# Altium PCB Battery_Converter.PcbDoc (part 2 of 2)
Units mm, origin at the board's own origin, x right, y up, seen from the top; angles counter-clockwise.
Board outline 240.65 x 121.03 mm, 2 copper layers (Power Layer, Signal Layer), stack 0.532 mm thick; 177 components, 92 nets, 492 pads, 9 vias.
Unrouted connection lines stored in the file: 129.
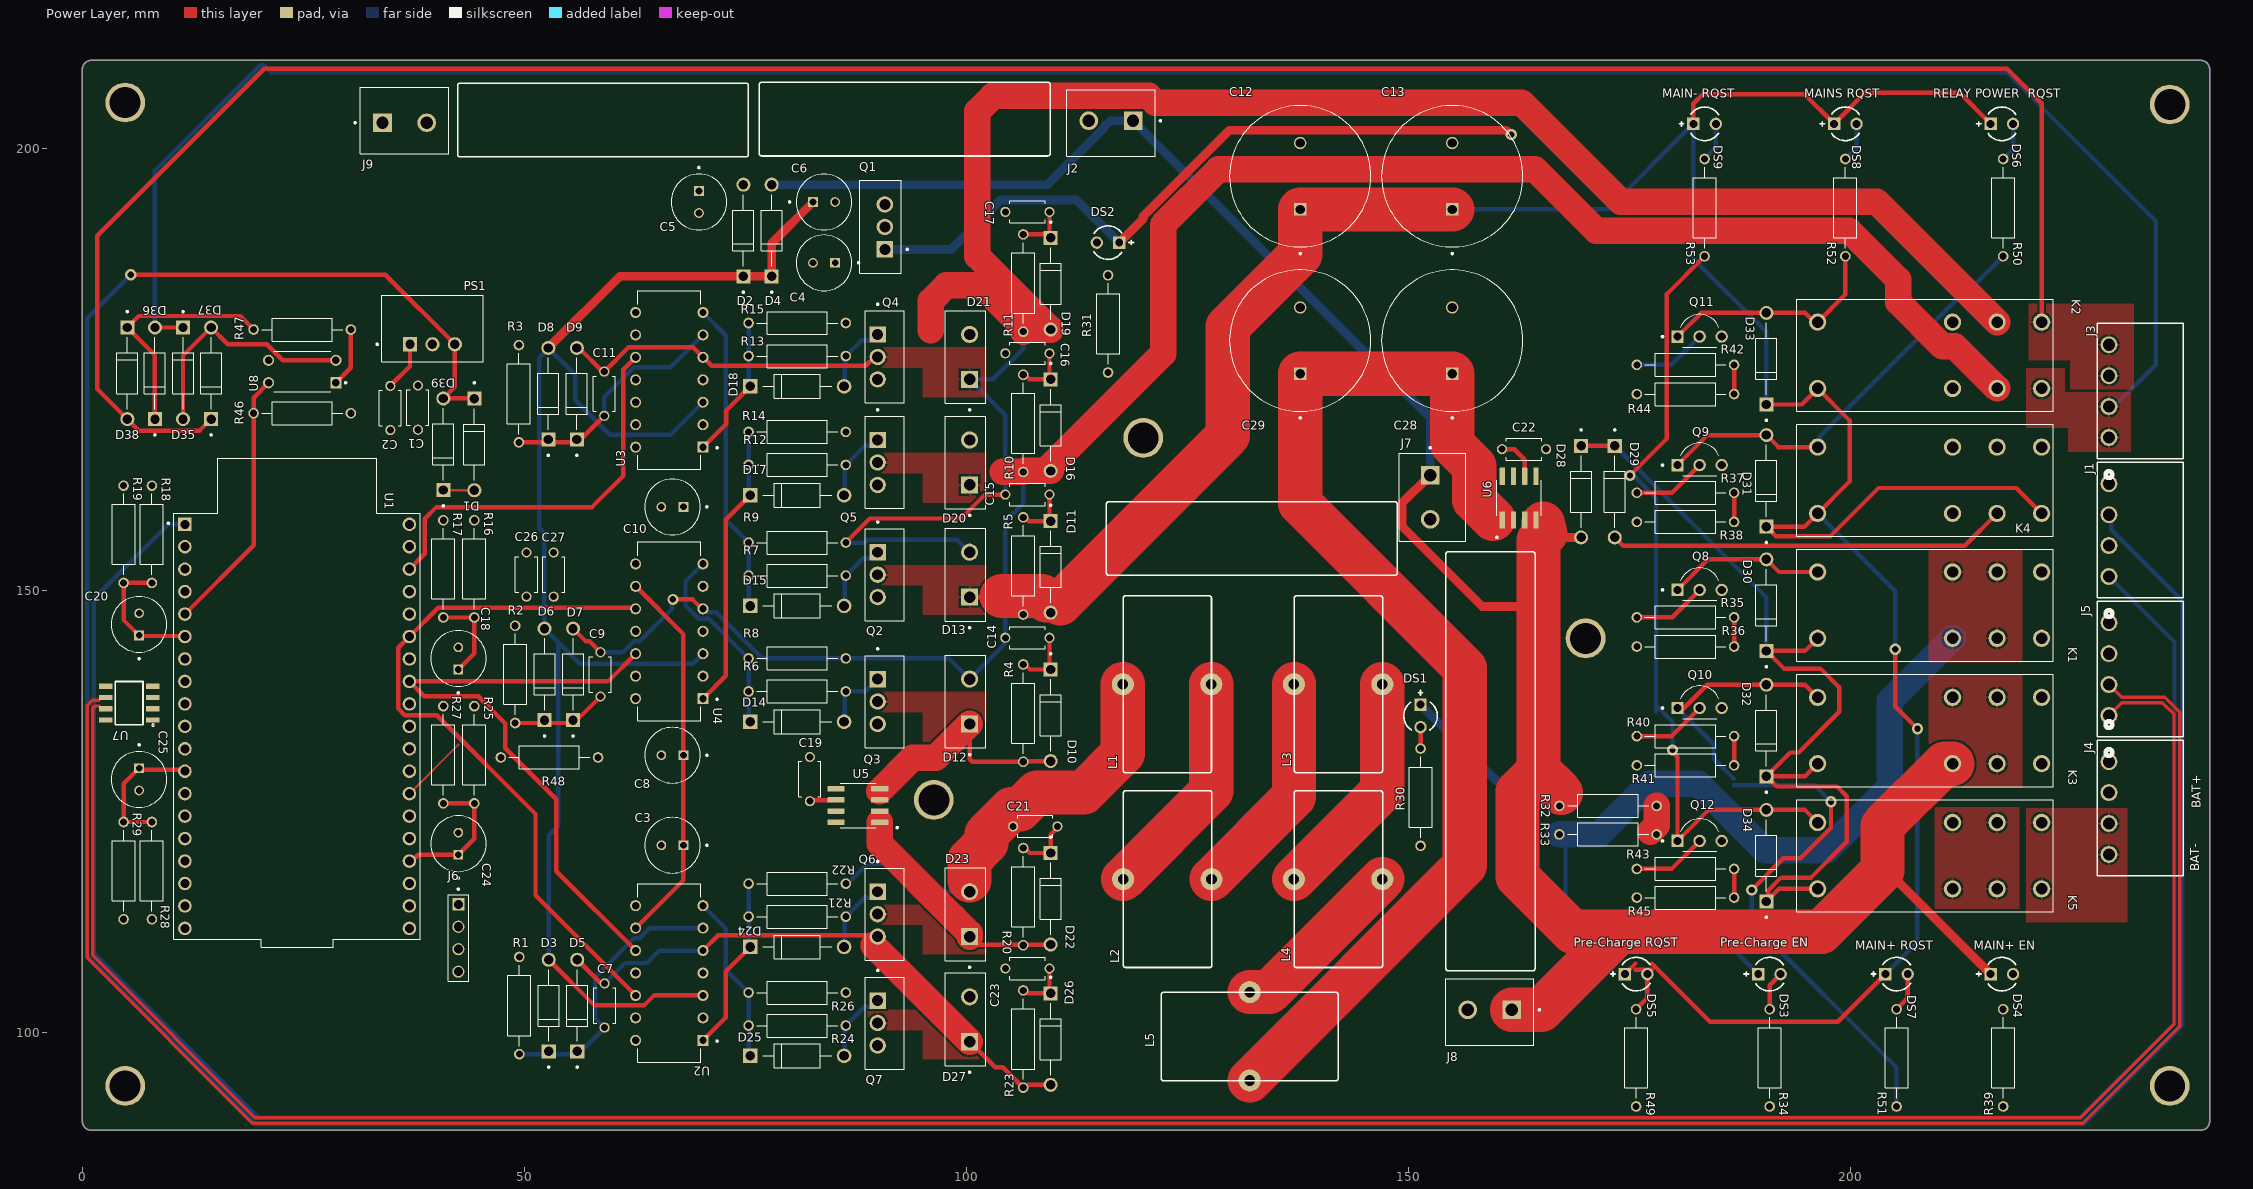
[diagram p0: Power Layer view]

## Polygon pours and split planes (outlines as drawn) (continued)
NetJ4_1 on Signal Layer "NETJ4_1_L04_P004" (solid, remove dead copper, pour order 4): 220.105,154.356 224.79,154.356 224.79,133.299 224.79,132.918 224.79,132.486 231.673,132.486 231.673,125.654 220.105,125.654
GND on Signal Layer "GND_L04_P002" (solid, remove dead copper, pour order 2): 209.55,125.425 219.1,125.425 219.1,113.97 209.55,113.97

## Keep-outs
Keep-Out Layer:
  the board outline again, w0.18

## Silkscreen, mask and mechanical layers (free items; w line width, h text height)
Top Overlay:
  lines w0.18: 42.443,199.263 ccw(c42.697,199.263) 42.697,199.009 75.082,199.009 ccw(c75.082,199.263) 75.336,199.263 75.336,207.086 ccw(c75.082,207.086) 75.082,207.34 42.697,207.34 ccw(c42.697,207.086) 42.443,207.086 42.443,199.263 ; 76.581,199.365 ccw(c76.835,199.365) 76.835,199.111 109.22,199.111 ccw(c109.22,199.365) 109.474,199.365 109.474,207.188 ccw(c109.22,207.188) 109.22,207.442 76.835,207.442 ccw(c76.835,207.188) 76.581,207.188 76.581,199.365 ; 115.849,151.917 ccw(c116.103,151.917) 116.103,151.663 148.488,151.663 ccw(c148.488,151.917) 148.742,151.917 148.742,159.741 ccw(c148.488,159.741) 148.488,159.995 116.103,159.995 ccw(c116.103,159.741) 115.849,159.741 115.849,151.917 ; 154.254,107.188 ccw(c154.508,107.188) 154.508,106.934 164.084,106.934 ccw(c164.084,107.188) 164.338,107.188 164.338,154.076 ccw(c164.084,154.076) 164.084,154.33 154.508,154.33 ccw(c154.508,154.076) 154.254,154.076 154.254,107.188
  text "MAIN- RQST" at 178.714,205.689 h1
  text "MAINS RQST" at 194.793,205.689 h1
  text "RELAY POWER  RQST" at 209.398,205.689 h1
  text "BAT+" at 239.649,125.324 h1 r90
  text "BAT-" at 239.497,118.186 h1 r90
  text "Pre-Charge RQST" at 168.707,109.63 h1
  text "Pre-Charge EN" at 185.293,109.63 h1
  text "MAIN+ RQST" at 200.584,109.296 h1
  text "MAIN+ EN" at 213.97,109.296 h1